# Altium PCB XPIAC-C_1V3.PCBDOC (part 2 of 4)
Units mil, origin at the board's own origin, x right, y up, seen from the top; angles counter-clockwise.
Board outline 2484.32 x 1736.28 mil, 6 copper layers (Top Layer, Internal Plane 1, Mid-Layer 1, Mid-Layer 2, Mid-Layer 3, Bottom Layer); 176 components, 110 nets, 677 pads, 395 vias.
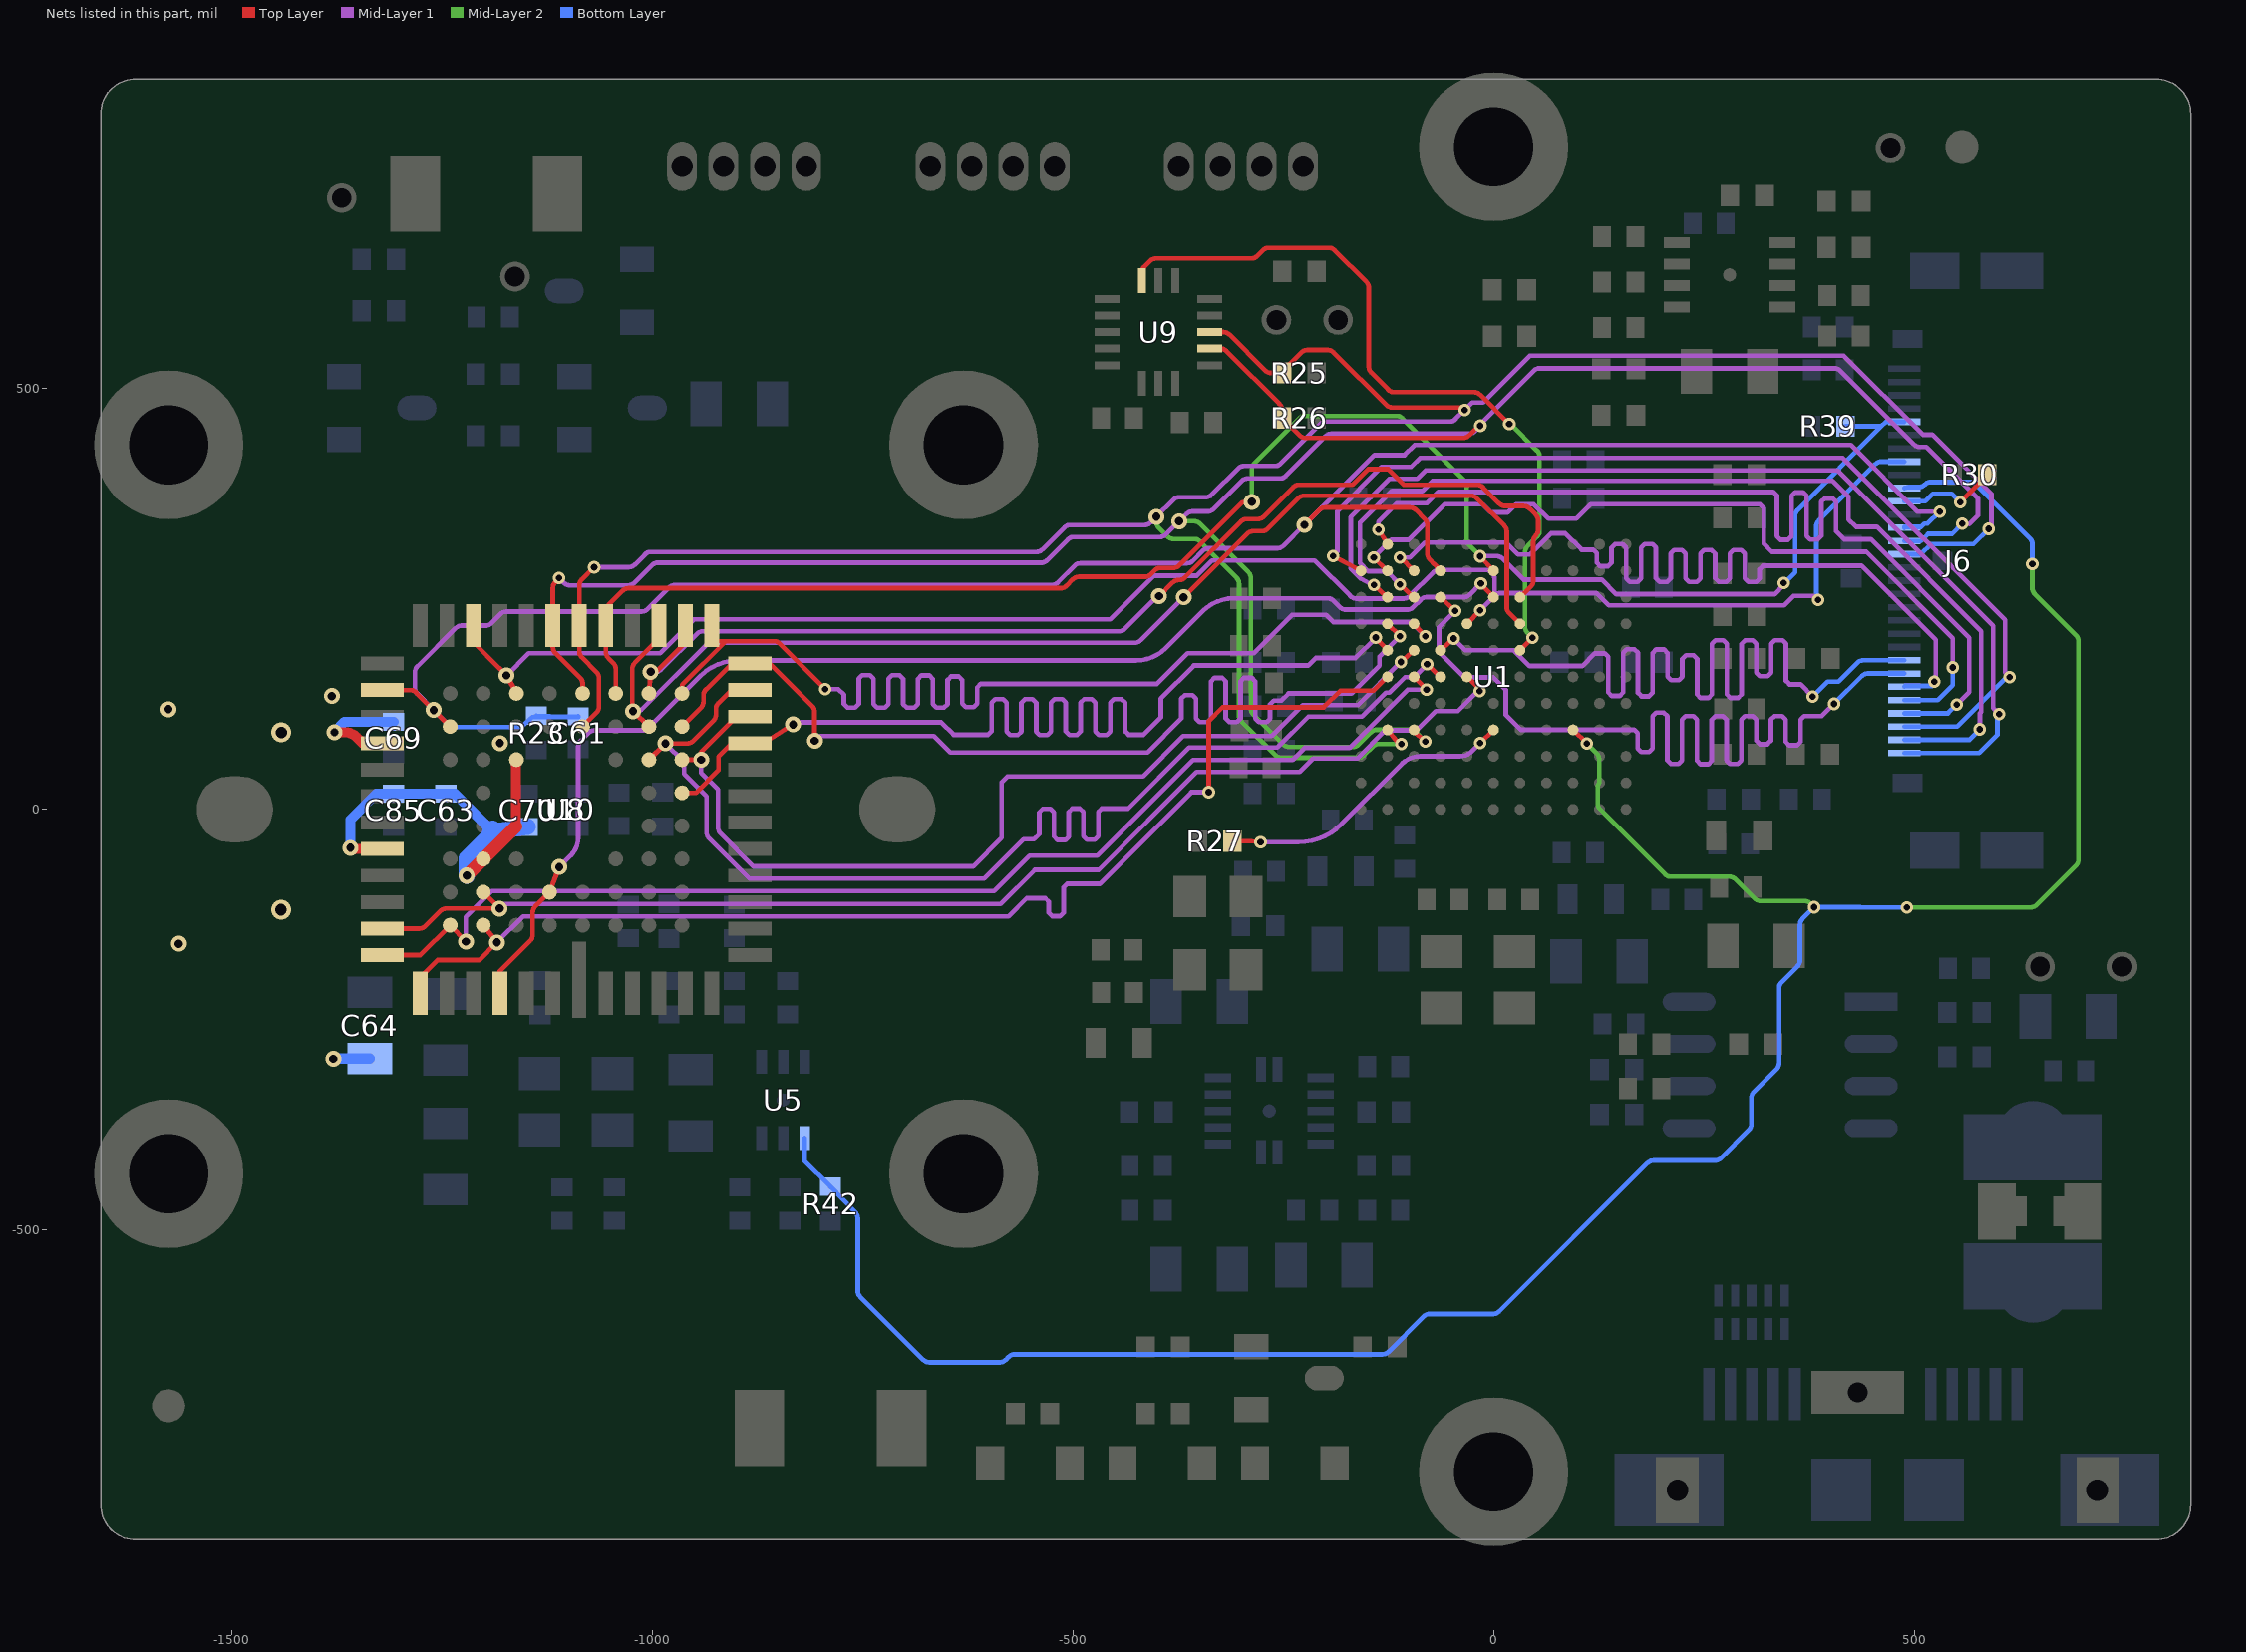
[diagram p6: the nets of this part, all layers, seen from the top]

## Via types
v1: diameter 15, hole 7.87, Top Layer to Bottom Layer, 163 vias
v2: diameter 19, hole 9.84, Top Layer to Bottom Layer, 131 vias
v3: diameter 23.62, hole 13.78, Top Layer to Bottom Layer, 77 vias
v4: diameter 27.95, hole 15.75, Top Layer to Bottom Layer, 17 vias
v5: diameter 0, hole 0, Top Layer to Bottom Layer, 3 vias
v6: diameter 20.47, hole 11.81, Top Layer to Bottom Layer, 2 vias
v7: diameter 35, hole 19.68, Top Layer to Bottom Layer, 2 vias

## Nets (pads, with @x,y where several pads share a name; then routed paths per layer and width w, separated by ;. In a path a pad name is that pad's centre, name@x,y a point inside that pad or via, vN(x,y) a via of type N, cw(c..) or ccw(c..) an arc to the next point about the centre after c; other vN are vias at no path point) (continued)
ADDR_CTL_0: J6.11 R30.1 | length 122.3
  Top Layer w5.6: v1(554.6,364.91) 587.68,398 R30.1@586.49,398
  Bottom Layer w5.6: J6.11@488.19,366.14 513.2,366.14 522.13,375.08 544.43,375.08 v1(554.6,364.91)
AGND: C63.1 C64.1 C69.1 C70.1 C85.1 U8.C7 U8.F6 U10.34 U10.38 | length 732.6
  Top Layer w12: v2(-1377.72,91.7) -1365.93,91.7 cw(c-1365.93,70.7) -1351.08,85.55 -1344.27,78.74 U10.34@-1320.87,78.74 ; v2(-1358.86,-45.69) -1357.31,-47.24 U10.38@-1320.87,-47.24 ; -1162.23,-20.5 -1162.23,58.24 U8.F6@-1161.42,59.06
  Top Layer w15.75: v2(-1220.47,-78.74) U8.C7@-1200.79,-59.06 -1162.23,-20.5
  Bottom Layer w12: v2(-1379.12,-296.47) -1378.88,-296.22 C64.1@-1335.86,-296.22 ; v2(-1377.72,91.7) -1377.72,92.03 -1365.57,104.18 C69.1@-1307.51,104.18 ; v2(-1358.86,-45.69) -1358.86,-12.26 -1327.99,18.62 C85.1@-1307.51,18.62 C63.1@-1245.14,18.62 -1234.58,18.62 -1193.02,-22.94 -1189.64,-22.94 -1192.75,-27.35
  Bottom Layer w19.68: v2(-1220.47,-78.74) -1220.47,-58.25 -1189.64,-27.43 -1189.64,-22.94 ; -1192.75,-27.35 C70.1@-1148.35,-20.75
  other v2: -1562.78,-159.86 -1181.1,78.74 -1575.12,118.99 -1380.88,134.68
  other v3: -1441.24,-119.27 -1440.88,91.38
CAMPWR_EN: J6.10 R42.1 U1.D3 U5.4 | length 3087.4
  Top Layer w5.6: U1.D3@94.49,94.49 111.27,78.95 v1(110.75,78.39)
  Mid-Layer 2 w5.6: v1(110.75,78.39) 122.76,66.37 ; v1(381.14,-116.29) v1@376.7,-111.85 ; v1(491.07,-116.62) 638.44,-116.62 ccw(c638.44,-106.82) 645.37,-113.75 692.17,-66.94 ccw(c685.24,-60.01) 695.04,-60.01 695.04,200.16 ccw(c685.24,200.16) 692.17,207.09 643.14,256.12 cw(c650.07,263.05) 640.27,263.05 v1(640.27,291.48) ; 122.76,66.37 cw(c115.83,59.44) 125.63,59.44 ; 122.76,66.37 cw(c115.83,59.44) 125.63,59.44 ; 123.89,6.73 ccw(c133.69,6.73) 126.76,-0.2 ; 123.89,6.73 ccw(c133.69,6.73) 126.76,-0.2 ; 123.89,6.73 123.89,29.12 125.63,30.86 125.63,59.44 ; 126.76,-0.2 203.75,-77.19 ; 203.75,-77.19 ccw(c210.68,-70.26) 210.68,-80.06 ; 203.75,-77.19 ccw(c210.68,-70.26) 210.68,-80.06 ; 210.68,-80.06 280.43,-80.06 ; 280.43,-80.06 cw(c280.43,-89.86) 287.36,-82.93 ; 280.43,-80.06 cw(c280.43,-89.86) 287.36,-82.93 ; 287.36,-82.93 310.53,-106.11 ; 310.53,-106.11 ccw(c317.46,-99.18) 317.46,-108.98 ; 310.53,-106.11 ccw(c317.46,-99.18) 317.46,-108.98 ; 317.46,-108.98 369.77,-108.98 ; 369.77,-108.98 cw(c369.77,-118.78) v1@376.7,-111.85 ; 369.77,-108.98 cw(c369.77,-118.78) v1@376.7,-111.85
  Bottom Layer w5.6: U5.4@-818.79,-390.81 -819.05,-391.06 -819.05,-417.7 R42.1@-788.1,-448.65 -758.5,-479.29 cw(c-765.55,-486.1) -755.75,-486.1 -755.75,-572.19 ccw(c-745.95,-572.19) -752.87,-579.12 -677.65,-654.35 ccw(c-670.72,-647.42) -670.72,-657.22 -586.82,-657.22 ccw(c-586.82,-647.42) -579.89,-654.35 -576.21,-650.66 cw(c-569.28,-657.59) -569.28,-647.79 -132.11,-647.79 ccw(c-132.11,-637.99) -125.18,-644.92 -82.86,-602.61 cw(c-75.93,-609.54) -75.93,-599.74 -0.27,-599.74 ccw(c-0.27,-589.94) 6.66,-596.87 183.25,-420.27 cw(c190.18,-427.2) 190.18,-417.4 263.26,-417.4 ccw(c263.26,-407.6) 270.19,-414.53 303.55,-381.17 ccw(c296.62,-374.24) 306.42,-374.24 306.42,-342.78 cw(c316.22,-342.78) 309.29,-335.86 336.65,-308.49 ccw(c329.72,-301.56) 339.52,-301.56 339.52,-212.47 cw(c349.32,-212.47) 342.4,-205.54 361.34,-186.6 ccw(c354.41,-179.67) 364.21,-179.67 364.21,-137.27 cw(c374.01,-137.27) 367.08,-130.34 v1(381.14,-116.29) 435.94,-116.29 436.27,-116.62 v1(491.07,-116.62) ; J6.10@488.19,381.89 491.61,382.85 cw(c494.27,373.42) 494.27,383.22 505.75,383.22 ccw(c505.75,393.02) 512.68,386.09 512.86,386.28 cw(c519.79,379.35) 519.79,389.15 566.19,389.15 cw(c566.19,379.35) 573.12,386.28 637.4,322 cw(c630.47,315.07) 640.27,315.07 v1(640.27,291.48)
CLK32K768: R27.1 U1.D6 | length 360.4
  Top Layer w5.6: R27.1@-310.35,-37.86 -288.23,-37.86 cw(c-288.23,-47.66) -287.2,-37.91 v1(-276.93,-38.99) ; v1(-15.75,78.74) U1.D6@0,94.49
  Mid-Layer 1 w5.6: v1(-276.93,-38.99) -231.96,-38.99 ccw(c-231.96,33.16) -180.94,-17.86 -108.92,54.16 cw(c-87.2,32.44) -87.2,63.16 -39.94,63.16 ccw(c-39.94,83.95) -25.24,69.25 v1(-15.75,78.74)
CMOS_D0: U1.F10 U8.A7 U10.43 | length 1435.6
  Top Layer w5.6: U10.43@-1275.59,-218.5 -1275.59,-199.48 -1255.38,-179.28 -1205.58,-179.28 v2(-1184.6,-158.3) ; v1(-338.56,20.48) -338.56,104.6 -321.92,121.24 -201.77,121.24 -181.97,141.04 -142.42,141.04 U1.F10@-125.98,157.48
  Top Layer w6: U8.A7@-1200.79,-137.8 v2(-1184.6,-158.3)
  Mid-Layer 1 w5.6: v2(-1184.6,-158.3) -1153.47,-127.17 -576.37,-127.17 -554.9,-105.7 -532.85,-105.7 -528.65,-109.9 -528.65,-122.96 -524.45,-127.16 -515.25,-127.16 -511.05,-122.96 -511.05,-92.73 -506.85,-88.53 -468.19,-88.53 -359.18,20.48 v1(-338.56,20.48) v1@-338.03,20.48
CMOS_D1: U1.F9 U8.A8 U10.42 | length 1426.6
  Top Layer w5.6: U10.42@-1320.87,-173.23 -1275.59,-173.23 U8.A8@-1240.16,-137.8 v2(-1221.56,-157.14) ; U1.F9@-94.49,157.48 v1(-79.58,142.38)
  Mid-Layer 1 w5.6: v2(-1221.56,-157.14) -1221.56,-127.99 -1190.82,-97.24 -593.57,-97.24 -551.4,-55.07 -470.79,-55.07 -356.95,58.77 -238.87,58.77 -224.42,73.22 -171.2,73.22 -102.04,142.38 v1(-79.58,142.38)
CMOS_D2: U1.F7 U8.B7 U10.41 | length 1471.3
  Top Layer w5.6: U10.41@-1320.87,-141.73 -1276.69,-141.73 ccw(c-1276.69,-131.93) -1269.76,-138.86 -1251.76,-120.86 cw(c-1244.83,-127.79) -1244.83,-117.99 v2(-1181.39,-117.99) U8.B7@-1200.79,-98.43 ; U1.F7@-31.5,157.48 -16.49,142.61 v1(-16.45,140.4)
  Mid-Layer 1 w5.6: v2(-1181.39,-117.99) -1175.88,-112.48 -585.78,-112.48 -545.23,-71.93 -469.38,-71.93 -352.82,44.63 -230.39,44.63 -214.53,60.49 -161.85,60.49 -128.34,94 -91.28,94 -68.44,116.84 -42.26,116.84 -18.69,140.4 v1(-16.45,140.4)
CMOS_D3: U1.G10 U8.E1 U10.15 | length 1332.7
  Top Layer w5.6: U8.E1@-964.57,19.69 -948.14,19.69 -921.14,46.69 -921.14,62.9 -905.3,78.74 U10.15@-883.86,78.74 -867.95,78.74 v2(-832.56,100.88) ; v1(-139.99,204.12) U1.G10@-125.98,188.98
  Mid-Layer 1 w5.6: v2(-832.56,100.88) -830.07,103.37 -656.5,103.37 -641.82,88.69 -600.63,88.69 -596.43,92.89 -596.43,126.91 -592.23,131.11 -583.03,131.11 -578.83,126.91 -578.83,92.41 -574.63,88.21 -565.43,88.21 -561.23,92.41 -561.23,126.91 -557.03,131.11 -547.83,131.11 -543.63,126.91 -543.63,92.41 -539.43,88.21 -530.23,88.21 -526.03,92.41 -526.03,126.91 -521.83,131.11 -512.63,131.11 -508.43,126.91 -508.43,92.41 -504.23,88.21 -495.03,88.21 -490.83,92.41 -490.83,126.91 -486.63,131.11 -477.43,131.11 -473.23,126.91 -473.23,92.41 -469.03,88.21 -459.83,88.21 -455.63,92.41 -455.63,126.91 -451.43,131.11 -442.23,131.11 -438.03,126.91 -438.03,92.89 -433.83,88.69 -415.73,88.69 -395.48,108.94 -395.48,131.73 -356.25,170.96 -220.15,170.96 -211.33,179.78 -164.33,179.78 v1(-139.99,204.12)
CMOS_D4: U1.G9 U8.F1 U10.16 | length 1189.4
  Top Layer w5.6: U8.F1@-964.57,59.06 v2(-941.87,58.98) -941.87,68.3 -899.77,110.39 -884.01,110.39 U10.16@-883.86,110.24 ; v1(-109.99,175.18) U1.G9@-94.49,188.98
  Mid-Layer 1 w5.6: v2(-941.87,58.98) -941.87,43.49 -921.85,23.48 -921.85,-21.45 ccw(c-912.05,-21.45) -918.98,-28.38 -879.57,-67.8 -618.71,-67.8 -584.72,-33.81 -584.72,32.34 -577.85,39.21 -416.7,39.21 -368.87,87.05 -263.5,87.05 -226.58,123.96 -161.21,123.96 v1(-109.99,175.18)
CMOS_D5: U1.F8 U8.F2 U10.17 | length 1441.3
  Top Layer w5.6: v2(-984.38,78.4) -958.38,78.4 ccw(c-958.38,88.2) -951.45,81.27 -927.17,105.56 ccw(c-934.1,112.49) -924.3,112.49 -924.29,119.26 cw(c-914.49,119.26) -921.42,126.19 -905.89,141.73 U10.17@-883.86,141.73 ; v1(-78.92,172.44) -63.48,157 U1.F8@-62.99,157.48
  Top Layer w6: U8.F2@-1003.94,59.06 v2(-984.38,78.4)
  Mid-Layer 1 w5.5: v2(-984.38,78.4) -962.15,56.17 -962.15,42.26 -935.44,15.55 -935.44,-27.41 ccw(c-925.81,-27.41) -932.62,-34.22 -884.47,-82.36 -605.48,-82.36 -558.82,-35.69 -546.09,-35.69 -539.94,-29.54 -539.94,-3.46 -535.82,0.67 -526.57,0.67 -522.44,-3.46 -522.44,-32.26 -518.25,-36.45 -509,-36.45 -504.94,-32.38 -504.94,-3.16 -500.82,0.97 -491.57,0.97 -487.44,-3.16 -487.44,-31.78 -483.28,-35.94 -474.03,-35.94 -469.94,-31.86 -469.94,-3.16 -465.82,0.97 -434.33,0.97 -361.93,73.37 -256.85,73.37 -219.97,110.24 -156.18,110.24 -127.74,138.69 -123.6,138.69 -105.09,157.19 -94.17,157.19 v1(-78.92,172.44)
CMOS_D6: U1.H10 U8.G1 U10.18 | length 1304.3
  Top Layer w5.6: U8.G1@-964.57,98.43 -941.96,121.03 ccw(c-948.89,127.96) -939.09,127.96 -939.09,135.56 cw(c-929.29,135.56) -936.22,142.49 -905.48,173.23 U10.18@-883.86,173.23 -860.36,173.23 -810.04,122.91 cw(c-816.97,115.98) -807.17,115.98 -807.17,81.62 v2(-806.77,81.62) ; U1.H10@-125.98,220.47 -111.47,205.96 -111.47,206.66 v1(-111.35,205.82)
  Mid-Layer 1 w5.6: v2(-806.77,81.62) -806.16,81.02 -799.93,87.25 -665.44,87.25 -645.85,67.65 -411.24,67.65 -371.11,107.79 -371.11,131.43 -366.91,135.63 -357.71,135.63 -353.51,131.43 -353.51,107.79 -349.31,103.59 -340.11,103.59 -335.91,107.79 -335.91,151.99 -331.71,156.19 -322.51,156.19 -318.31,151.99 -318.31,107.79 -314.11,103.59 -304.91,103.59 -300.71,107.79 -300.71,151.99 -296.51,156.19 -287.31,156.19 -283.11,151.99 -283.11,107.79 -278.91,103.59 -269.71,103.59 -265.51,107.79 -265.51,125.14 -261.31,129.34 -252.11,129.34 -243.71,137.74 -168.6,137.74 -135.58,170.76 -135.58,181.59 v1(-111.35,205.82)
CMOS_D7: U1.H9 U8.H1 U10.19 | length 1341.2
  Top Layer w5.6: U8.H1@-964.57,137.8 -964.57,147.89 -912.63,199.83 ; U10.19@-929.13,218.5 -929.13,199.83 -912.63,199.83 ; v1(-794.35,142.8) -848.51,196.96 ccw(c-855.44,190.03) -855.44,199.83 -912.63,199.83 ; U1.H9@-94.49,220.47 v1(-81.26,205.44)
  Mid-Layer 1 w5.6: v1(-794.35,142.8) -778.84,142.8 -772.14,136.09 -772.14,125.11 -767.94,120.91 -758.74,120.91 -754.54,125.11 -754.54,155.28 -750.34,159.48 -741.14,159.48 -736.94,155.28 -736.94,125.11 -732.74,120.91 -723.54,120.91 -719.34,125.11 -719.34,155.28 -715.14,159.48 -705.94,159.48 -701.74,155.28 -701.74,125.11 -697.54,120.91 -688.34,120.91 -684.14,125.11 -684.14,154.98 -679.94,159.18 -670.74,159.18 -666.54,154.98 -666.54,125.11 -662.34,120.91 -653.14,120.91 -648.94,125.11 -648.94,153.75 -644.74,157.95 -635.54,157.95 -631.34,153.75 -631.34,125.61 -627.14,121.41 -617.94,121.41 -613.74,125.61 -613.74,144.92 -609.54,149.12 -399.94,149.12 -363.49,185.57 -284.95,185.57 -239.47,231.06 -198.93,231.06 -190.53,222.66 -98.48,222.66 v1(-81.26,205.44)
CMOS_D8: J6.30 U1.J10 | length 1234.3
  Top Layer w5.6: v1(-142.02,266.73) U1.J10@-125.98,251.97
  Mid-Layer 1 w5.6: v1(-142.02,266.73) -142.6,265.68 -157.42,273.92 -169.74,286.25 -169.74,347.04 -123.98,392.81 -90.82,392.81 -80.74,402.89 408.98,402.89 593.63,218.24 593.63,120.45 v1(601.02,113.06)
  Bottom Layer w5.6: J6.30@488.19,66.93 577.05,66.93 598.7,88.58 598.7,110.73 v1(601.02,113.06)
CMOS_D9: J6.29 U1.J9 | length 1189.9
  Top Layer w5.6: v1(-111.23,267.4) U1.J9@-94.49,251.97
  Mid-Layer 1 w5.6: v1(-111.23,267.4) -126.8,282.97 -149.13,282.97 -158.64,292.48 -158.64,340.93 -120.9,378.67 -120.53,378.3 -84.61,378.3 -72.44,390.47 402.8,390.47 421.87,371.4 421.87,344.56 430.7,335.74 455.46,335.74 579.5,211.69 579.5,115.75 577.93,114.18 v1(577.93,95.12)
  Bottom Layer w5.6: J6.29@488.19,82.68 565.49,82.68 v1(577.93,95.12)
CMOS_D10: J6.28 U1.K11 | length 1212.6
  Top Layer w5.6: v1(-190.64,301.02) U1.K11@-157.48,283.46
  Mid-Layer 1 w5.6: v1(-190.64,301.02) -190.84,301.22 -185.63,306.44 -185.63,354.55 -133.1,407.08 -97.96,407.08 -87.2,417.85 415.05,417.85 607.97,224.92 607.97,162.38 v1(613.35,157)
  Bottom Layer w5.6: J6.28@488.19,98.43 551.2,98.43 609.77,157 v1(613.35,157)
CMOS_D11: J6.27 U1.L10 | length 1186.1
  Top Layer w5.6: v1(-136.67,332.39) U1.L10@-125.98,314.96
  Mid-Layer 1 w5.6: v1(-136.67,332.39) -136.67,341.97 -114.84,363.8 -79.08,363.8 -65.64,377.24 332.62,377.24 336.82,373.04 336.82,324.61 341.02,320.41 350.22,320.41 354.42,324.61 354.42,372.46 358.62,376.66 367.82,376.66 372.02,372.46 372.02,324.92 376.22,320.72 385.42,320.72 389.62,324.92 389.62,365.39 393.82,369.59 403.02,369.59 407.22,365.39 407.22,330.43 416.75,320.9 448.47,320.9 565.38,204 565.38,139.51 v1(550.36,124.49)
  Bottom Layer w5.6: J6.27@488.19,114.17 540.04,114.17 v1(550.36,124.49)
CMOS_D12: J6.26 U1.K10 | length 971.7
  Top Layer w5.6: v1(-142.4,299.21) U1.K10@-125.98,283.46
  Mid-Layer 1 w5.6: v1(-142.4,299.21) -121.23,320.38 -100.57,320.38 -58.15,362.8 -13.05,362.8 -3.03,352.77 16.83,352.77 26.86,362.8 47.74,362.8 65.13,345.42 98.52,345.42 115.91,362.8 315.92,362.8 316.42,362.3 317.09,362.3 321.29,358.1 321.29,315.6 330.81,306.07 443.14,306.07 545.88,203.33 v1(545.88,168.65)
  Bottom Layer w5.6: J6.26@488.19,129.92 527.99,129.92 545.88,147.8 v1(545.88,168.65)
CMOS_D13: J6.25 U1.K9 | length 1190.4
  Top Layer w5.6: v1(-111.21,299.21) -110.6,299.8 U1.K9@-94.49,283.46
  Mid-Layer 1 w5.6: v1(-111.21,299.21) -99.33,299.21 -81.46,317.08 15.11,317.08 29.25,302.94 43.36,302.94 68.37,327.95 85.33,327.95 104.75,308.53 118.46,308.53 122.66,304.33 122.66,293.06 126.86,288.86 136.06,288.86 140.26,293.06 140.26,311.03 144.46,315.23 153.66,315.23 157.86,311.03 157.86,274.3 162.06,270.1 171.26,270.1 175.46,274.3 175.46,311.11 179.66,315.31 188.86,315.31 193.06,311.11 193.06,274.3 197.26,270.1 206.46,270.1 210.66,274.3 210.66,303.88 214.86,308.08 224.06,308.08 228.26,303.88 228.26,274.3 232.46,270.1 241.66,270.1 245.86,274.3 245.86,303.88 250.06,308.08 259.26,308.08 263.46,303.88 263.46,274.3 267.66,270.1 276.86,270.1 281.06,274.3 281.06,303.88 285.26,308.08 294.46,308.08 298.66,303.88 298.66,274.3 302.86,270.1 312.06,270.1 316.26,274.3 316.26,285.32 320.46,289.52 437.38,289.52 525.55,201.35 525.55,151.62 v1(523.81,151.62)
  Bottom Layer w5.6: J6.25@488.19,145.67 489.24,146.72 521.12,146.72 524.91,150.51 v1(523.81,151.62)
CMOS_D14: J6.24 U1.J8 | length 1207.4
  Top Layer w5.6: U1.J8@-62.99,251.97 v1(-45.55,235.82)
  Mid-Layer 1 w5.6: v1(-45.55,235.82) -64.7,216.66 -64.7,186.95 -34.39,156.64 -0.03,156.64 14.69,141.92 14.69,112.24 32.27,94.66 167.19,94.66 171.39,90.46 171.39,72.47 175.59,68.27 184.79,68.27 188.99,72.47 188.99,110.87 193.19,115.07 202.39,115.07 206.59,110.87 206.59,58.07 210.79,53.87 219.99,53.87 224.19,58.07 224.19,106.73 228.39,110.93 237.59,110.93 241.79,106.73 241.79,57.84 245.99,53.64 255.19,53.64 259.39,57.84 259.39,106.73 263.59,110.93 272.79,110.93 276.99,106.73 276.99,58.07 281.19,53.87 290.39,53.87 294.59,58.07 294.59,106.73 298.79,110.93 307.99,110.93 312.19,106.73 312.19,81.62 316.39,77.42 325.59,77.42 329.79,81.62 329.79,106.73 333.99,110.93 343.19,110.93 347.39,106.73 347.39,80.34 351.59,76.14 360.79,76.14 364.99,80.34 364.99,106.73 369.19,110.93 390.21,110.93 v1(404.71,125.43)
  Bottom Layer w5.6: v1(404.71,125.43) 437.83,158.55 cw(c444.75,151.62) 444.75,161.42 J6.24@488.19,161.42
CMOS_D15: J6.23 U1.G8 | length 1213.8
  Top Layer w5.6: U1.G8@-62.99,188.98 v1(-47.44,202.96)
  Mid-Layer 1 w5.6: v1(-47.44,202.96) -33.59,189.11 23.85,189.11 42.6,170.37 105.55,170.37 120.49,185.31 132.25,185.31 136.45,181.11 136.45,138.99 140.65,134.79 149.85,134.79 154.05,138.99 154.05,186.05 158.25,190.25 167.45,190.25 171.65,186.05 171.65,138.52 175.85,134.32 185.05,134.32 189.25,138.52 189.25,185.78 193.45,189.98 202.65,189.98 206.85,185.78 206.85,157.78 211.05,153.58 220.25,153.58 224.45,157.78 224.45,179.1 228.65,183.3 237.85,183.3 242.05,179.1 242.05,136.62 246.25,132.42 255.45,132.42 259.65,136.62 259.65,196.72 263.85,200.92 273.05,200.92 277.25,196.72 277.25,136.62 281.45,132.42 290.65,132.42 294.85,136.62 294.85,196.72 299.05,200.92 308.25,200.92 312.45,196.72 312.45,162.31 316.65,158.11 325.85,158.11 330.05,162.31 330.05,196.72 334.25,200.92 343.45,200.92 347.65,196.72 347.65,152.74 351.85,148.54 364.87,148.54 v1(379.35,134.06)
  Bottom Layer w5.6: v1(379.35,134.06) 397.02,151.72 409.82,151.72 432.39,174.3 cw(c439.32,167.37) 439.32,177.17 J6.23@488.19,177.17
CMOS_HD: U1.J5 U8.H2 U10.20 | length 1378.4
  Top Layer w5.6: U8.H2@-1003.94,137.8 v2(-1001.9,163.46) -995.19,163.46 -960.63,198.01 U10.20@-960.63,218.5 ; v2(-397.55,253.3) -381.23,269.62 cw(c-374.3,262.69) -374.3,272.49 -373.87,272.49 ccw(c-373.87,282.29) -366.94,275.36 -300.17,342.14 cw(c-293.24,335.21) -293.24,345.01 -280.01,345.01 ccw(c-280.01,354.81) -273.08,347.88 -237.96,382.99 cw(c-231.03,376.06) -231.03,385.86 -167.42,385.86 -148.98,404.3 -124.8,404.3 -106.95,386.46 -106.95,385.86 -19.64,385.86 cw(c-19.64,376.06) -12.71,382.99 6.84,363.44 ccw(c13.77,370.37) 13.77,360.57 35.65,360.57 cw(c35.65,350.77) 42.58,357.7 50.17,350.11 cw(c43.24,343.18) 53.04,343.18 53.04,332.22 cw(c43.24,332.22) 50.17,325.3 50.11,325.24 ccw(c57.04,318.31) 47.24,318.31 47.24,271.78 cw(c37.44,271.78) 44.37,264.85 U1.J5@31.5,251.97
  Mid-Layer 1 w5.6: v2(-1001.9,163.46) -996.21,163.46 ccw(c-996.21,173.26) -989.28,166.33 -946.94,208.66 cw(c-940.01,201.73) -940.01,211.53 -445.38,211.53 ccw(c-445.38,221.33) -438.45,214.4 -399.55,253.3 v2(-397.55,253.3)
CMOS_OE: J6.8 U1.H7 U8.H6 U10.28 | length 2100.6
  Top Layer w5.6: U10.28@-1212.6,218.5 -1212.6,198.83 -1181.1,167.34 v2(-1173.24,159.07) ; U1.H7@-31.5,220.47 v1(-16.06,236.63)
  Top Layer w6: v2(-1173.24,159.07) U8.H6@-1161.42,137.8
  Mid-Layer 1 w5.6: v2(-1173.24,159.07) -1146.75,185.55 -990.82,185.55 -950.51,225.86 -455.38,225.86 -403.51,277.73 -352.67,277.73 -334.66,295.74 -212.55,295.74 -170.18,253.36 ; v1(-16.06,236.63) 1.15,253.84 ; v1(385.79,249.02) 386.12,249.02 381.64,253.5 356.49,253.5 345.31,242.33 136.87,242.33 122.18,257.02 8.39,257.02 ccw(c8.39,247.22) 1.46,254.15 1.15,253.84 ; -170.18,253.36 ccw(c-163.25,260.29) -163.25,250.49 ; -170.18,253.36 ccw(c-163.25,260.29) -163.25,250.49 ; -163.25,250.49 -106.81,250.49 ; -106.81,250.49 ccw(c-106.81,260.29) -99.88,253.36 ; -106.81,250.49 ccw(c-106.81,260.29) -99.88,253.36 ; -99.88,253.36 -71.58,281.66 ; -71.58,281.66 cw(c-64.65,274.73) -64.65,284.53 ; -71.58,281.66 cw(c-64.65,274.73) -64.65,284.53 ; -64.65,284.53 -30.46,284.53 -30.4,284.59 -9.39,284.59 ; -9.39,284.59 cw(c-9.39,274.79) -2.46,281.72 ; -9.39,284.59 cw(c-9.39,274.79) -2.46,281.72 ; -2.46,281.72 -1.72,280.98 ; -1.72,280.98 cw(c-8.65,274.05) 1.15,274.05 ; -1.72,280.98 cw(c-8.65,274.05) 1.15,274.05 ; 1.15,253.84 1.15,274.05
  Bottom Layer w5.6: v1(385.79,249.02) 383.64,248.35 383.64,335.93 cw(c393.44,335.93) 386.51,342.86 454.16,410.52 cw(c461.09,403.59) 461.09,413.39 J6.8@488.19,413.39
CMOS_PCLK: U1.J6 U8.B5 U10.46 | length 1505.4
  Top Layer w5.6: U10.46@-1181.1,-218.5 -1181.1,-192.27 -1145.03,-156.2 ccw(c-1151.96,-149.27) -1142.16,-149.27 -1142.16,-122.6 cw(c-1132.36,-122.6) -1139.29,-115.67 U8.B5@-1122.05,-98.43 ; v1(-15.08,268.35) U1.J6@0,251.97
  Top Layer w6: U8.B5@-1122.05,-98.43 v2(-1110.4,-68.56)
  Mid-Layer 1 w5.6: v2(-1110.4,-68.56) -1096.96,-55.12 ccw(c-1118.81,-33.27) -1087.91,-33.27 -1087.91,74.6 cw(c-1078.11,74.6) -1085.04,81.53 -1075.58,90.99 cw(c-1068.65,84.06) -1068.65,93.86 -1011.5,93.86 ccw(c-1011.5,103.66) -1004.57,96.73 -943.11,158.19 cw(c-897.9,112.97) -897.9,176.92 -424.82,176.92 ccw(c-424.82,226.7) -389.62,191.5 -345.64,235.48 cw(c-308.65,198.49) -308.65,250.8 -197.2,250.8 cw(c-197.2,241) -190.27,247.93 -182.43,240.09 ccw(c-175.5,247.02) -175.5,237.22 -102.66,237.22 ccw(c-102.66,247.02) -95.73,240.09 -86.64,249.19 cw(c-79.71,242.26) -79.71,252.06 -35.44,252.06 ccw(c-35.44,261.86) -28.51,254.93 v1(-15.08,268.35)
CMOS_RST: C61.2 J6.13 R23.1 U1.K8 U8.G8 U10.32 | length 2816.4
  Top Layer w5.6: U10.32@-1320.87,141.73 -1287.52,141.73 cw(c-1287.52,131.93) -1280.59,138.86 v2(-1259.84,118.11) ; v2(-224.85,338.03) -206.97,355.91 cw(c-200.04,348.98) -200.04,358.78 -99.38,358.78 cw(c-99.38,348.98) -92.45,355.91 -81.59,345.06 cw(c-88.52,338.13) -78.72,338.13 -78.72,303.9 ccw(c-68.92,303.9) -75.85,296.97 -70.13,291.25 cw(c-77.06,284.32) -69.84,290.94 U1.K8@-62.99,283.46
  Top Layer w6: v2(-1259.84,118.11) U8.G8@-1240.16,98.43
  Mid-Layer 1 w5.5: v2(-1259.84,118.11) -1279.29,137.56 ; v2(-224.85,338.03) -249.78,313.1 ; -1282.11,144.36 ccw(c-1272.48,144.36) -1279.29,137.56 ; -1282.11,144.36 ccw(c-1272.48,144.36) -1279.29,137.56 ; -1282.11,144.36 -1282.11,162.99 ; -1282.11,162.99 cw(c-1272.48,162.99) -1279.29,169.8 ; -1282.11,162.99 cw(c-1272.48,162.99) -1279.29,169.8 ; -1279.29,169.8 -1233.58,215.51 ; -1233.58,215.51 cw(c-1226.78,208.7) -1226.78,218.32 ; -1233.58,215.51 cw(c-1226.78,208.7) -1226.78,218.32 ; -1226.78,218.33 -1198.07,218.33 ; -1198.07,218.33 ccw(c-1198.07,227.95) -1191.27,221.14 ; -1198.07,218.33 ccw(c-1198.07,227.95) -1191.27,221.14 ; -1191.27,221.14 -1180.26,232.15 ; -1180.26,232.15 cw(c-1173.45,225.35) -1173.45,234.97 ; -1180.26,232.15 cw(c-1173.45,225.35) -1173.45,234.97 ; -1173.45,234.97 -1012.71,234.97 ; -1012.71,234.97 ccw(c-1012.71,244.6) -1005.91,237.79 ; -1012.71,234.97 ccw(c-1012.71,244.6) -1005.91,237.79 ; -1005.91,237.79 -979.91,263.78 ; -979.91,263.78 cw(c-973.11,256.98) -973.11,266.6 ; -979.91,263.78 cw(c-973.11,256.98) -973.11,266.6 ; -973.11,266.6 -524.84,266.6 ; -524.84,266.6 ccw(c-524.84,276.23) -518.03,269.42 ; -524.84,266.6 ccw(c-524.84,276.23) -518.03,269.42 ; -518.03,269.42 -497.83,289.63 ; -497.83,289.63 cw(c-491.02,282.82) -491.02,292.45 ; -497.83,289.63 cw(c-491.02,282.82) -491.02,292.45 ; -491.02,292.45 -364.23,292.45 ; -364.23,292.45 ccw(c-364.23,302.07) -357.43,295.26 ; -364.23,292.45 ccw(c-364.23,302.07) -357.43,295.26 ; -357.43,295.26 -345.23,307.46 ; -345.23,307.46 cw(c-338.43,300.66) -338.43,310.28 ; -345.23,307.46 cw(c-338.43,300.66) -338.43,310.28 ; -338.43,310.28 -256.59,310.28 ; -256.59,310.28 ccw(c-256.59,319.91) -249.78,313.1 ; -256.59,310.28 ccw(c-256.59,319.91) -249.78,313.1
  Mid-Layer 1 w5.6: v2(-224.85,338.03) -141.4,421.05 -105.76,421.05 -93.73,433.08 424.73,433.08 503.87,353.86 v1(530.21,353.86)
  Bottom Layer w5.5: v2(-1259.84,118.11) -1242.46,100.73 ccw(c-1235.66,107.54) -1235.66,97.91 -1158.84,97.91 ccw(c-1158.84,107.54) -1152.03,100.73 -1145.28,107.48 cw(c-1138.47,100.68) -1138.54,110.3 C61.2@-1088.01,110.65
  Bottom Layer w5.6: R23.1@-1137.64,111.44 -1087.56,109.53 -1142.49,109.53 C61.2@-1088.01,110.65 ; J6.13@488.19,334.65 488.19,335.6 508.13,335.6 511.95,339.43 515.78,339.43 v1(530.21,353.86)
CMOS_VD: U1.H5 U8.G2 U10.21 | length 1418.1
  Top Layer w5.6: v2(-1022.74,116.73) -1023.68,117.66 -1023.68,167.08 cw(c-1013.88,167.08) -1020.81,174.01 -992.13,202.69 U10.21@-992.13,218.5 ; v2(-368.34,251.94) -292.56,327.72 cw(c-285.63,320.79) -285.63,330.59 -275.35,330.59 ccw(c-275.35,340.39) -268.42,333.46 -232,369.88 cw(c-225.07,362.95) -225.07,372.75 -26.71,372.75 cw(c-26.71,362.95) -19.78,369.88 12.86,337.23 cw(c5.93,330.3) 15.73,330.3 15.73,240.29 ccw(c25.53,240.29) 18.6,233.36 U1.H5@31.5,220.47
  Top Layer w6: v2(-1022.74,116.73) U8.G2@-1003.94,98.43
  Mid-Layer 1 w5.5: v2(-1022.74,116.73) -1018.35,116.73 ccw(c-1018.35,126.35) -1011.55,119.55 -935.99,195.1 cw(c-929.18,188.3) -929.18,197.92 -426.35,197.92 ccw(c-426.35,207.55) -419.54,200.74 v2(-368.34,251.94)
EXPOSURE: J6.5 R39.1 U1.K6 U8.H3 U10.23 | length 2287.8
  Top Layer w5.6: U8.H3@-1043.31,137.8 -1043.31,166.83 ccw(c-1053.11,166.83) -1046.18,173.76 -1052.25,179.83 cw(c-1045.32,186.76) -1055.12,186.76 U10.23@-1055.12,218.5 U10.23@-1055.12,235.77 ; v2(-287.24,365.46) -287.61,365.08 -298.26,365.08 -373.61,289.74 ; v1(-15.91,300.83) -15.95,300.79 U1.K6@0,283.46 ; U10.23@-1055.12,235.77 cw(c-1045.32,235.77) U10.23@-1052.25,242.7 ; U10.23@-1055.12,235.77 cw(c-1045.32,235.77) U10.23@-1052.25,242.7 ; U10.23@-1055.12,235.77 cw(c-1045.32,235.77) U10.23@-1052.25,242.7 ; U10.23@-1052.25,242.7 -1035.02,259.93 ; -1035.02,259.93 cw(c-1028.09,253) -1028.09,262.8 ; -1035.02,259.93 cw(c-1028.09,253) -1028.09,262.8 ; -1035.02,259.93 cw(c-1028.09,253) -1028.09,262.8 ; -1028.09,262.8 -514.46,262.8 ; -514.46,262.8 ccw(c-514.46,272.6) -507.53,265.67 ; -514.46,262.8 ccw(c-514.46,272.6) -507.53,265.67 ; -514.46,262.8 ccw(c-514.46,272.6) -507.53,265.67 ; -507.53,265.67 -499.68,273.52 ; -499.68,273.52 cw(c-492.75,266.59) -492.75,276.39 ; -499.68,273.52 cw(c-492.75,266.59) -492.75,276.39 ; -499.68,273.52 cw(c-492.75,266.59) -492.75,276.39 ; -492.75,276.39 -414.4,276.39 ; -414.4,276.39 ccw(c-414.4,286.19) -407.47,279.26 ; -414.4,276.39 ccw(c-414.4,286.19) -407.47,279.26 ; -414.4,276.39 ccw(c-414.4,286.19) -407.47,279.26 ; -407.47,279.26 -402.73,284 ; -402.73,284 cw(c-395.8,277.07) -395.8,286.87 ; -402.73,284 cw(c-395.8,277.07) -395.8,286.87 ; -402.73,284 cw(c-395.8,277.07) -395.8,286.87 ; -395.8,286.87 -380.54,286.87 ; -380.54,286.87 ccw(c-380.54,296.67) -373.61,289.74 ; -380.54,286.87 ccw(c-380.54,296.67) -373.61,289.74 ; -380.54,286.87 ccw(c-380.54,296.67) -373.61,289.74
  Mid-Layer 1 w5.6: v1(-15.91,300.83) v1(-15.91,300.83) 3.75,300.91 ; v1(344.93,268.95) 344.77,266.43 333.99,255.66 145.82,255.66 128.53,272.95 35.8,272.95 20.08,288.66 10.67,298.05 ; 3.75,300.91 cw(c3.75,291.11) 10.67,298.05 ; 3.75,300.91 cw(c3.75,291.11) 10.67,298.05
  Mid-Layer 2 w5.6: v2(-287.24,365.46) -287.24,404.25 ; v1(-15.91,300.83) -29.03,313.89 ; -287.24,404.25 cw(c-277.44,404.25) -284.37,411.18 ; -287.24,404.25 cw(c-277.44,404.25) -284.37,411.18 ; -287.24,404.25 cw(c-277.44,404.25) -284.37,411.18 ; -284.37,411.18 -230.76,464.79 ; -230.76,464.79 cw(c-223.83,457.86) -223.83,467.66 ; -230.76,464.79 cw(c-223.83,457.86) -223.83,467.66 ; -230.76,464.79 cw(c-223.83,457.86) -223.83,467.66 ; -223.83,467.66 -115.19,467.66 ; -115.19,467.66 cw(c-115.19,457.86) -108.26,464.79 ; -115.19,467.66 cw(c-115.19,457.86) -108.26,464.79 ; -115.19,467.66 cw(c-115.19,457.86) -108.26,464.79 ; -108.26,464.79 -34.77,391.3 ; -34.77,391.3 cw(c-41.7,384.37) -31.9,384.37 ; -34.77,391.3 cw(c-41.7,384.37) -31.9,384.37 ; -34.77,391.3 cw(c-41.7,384.37) -31.9,384.37 ; -31.9,320.82 ccw(c-22.1,320.82) -29.03,313.89 ; -31.9,320.82 ccw(c-22.1,320.82) -29.03,313.89 ; -31.9,320.82 ccw(c-22.1,320.82) -29.03,313.89 ; -31.9,320.82 -31.9,384.37
  Bottom Layer w5.6: v1(344.93,268.95) 345.86,268.44 346.53,269.66 358.43,281.56 358.43,348.61 ; R39.1@418.41,455.41 461.18,455.41 ; J6.5@488.19,460.63 466.4,460.63 461.18,455.41 ; 358.43,348.61 cw(c368.23,348.61) 361.3,355.54 ; 358.43,348.61 cw(c368.23,348.61) 361.3,355.54 ; 361.3,355.54 461.18,455.41
FX3_SCL: J6.14 R26.2 U1.D9 U8.H4 U9.2 U10.25 | length 3193.8
  Top Layer w5.6: v1(-1110.64,274.77) v1@-1115.24,270.17 ; U8.H4@-1082.68,137.8 -1082.68,149.13 ccw(c-1092.48,149.13) -1085.55,156.06 -1115.24,185.75 cw(c-1108.31,192.68) -1118.11,192.68 U10.25@-1118.11,218.5 -1118.11,263.24 ; U9.2@-337.13,547.62 -324.47,547.62 cw(c-324.47,537.82) -317.54,544.75 -254.28,481.48 cw(c-261.21,474.55) -251.41,474.55 -251.41,465.15 R26.2@-251.3,465.15 -230.51,444.35 ccw(c-223.58,451.28) -223.58,441.48 -36.06,441.48 ccw(c-36.06,451.28) -29.13,444.35 -17.5,455.98 v1(-15.7,455.98) ; U1.D9@-94.49,94.49 -95.52,93.31 v1(-81.12,80.59) ; -1118.11,263.24 cw(c-1108.31,263.24) v1@-1115.24,270.17 ; -1118.11,263.24 cw(c-1108.31,263.24) v1@-1115.24,270.17 ; -1118.11,263.24 cw(c-1108.31,263.24) v1@-1115.24,270.17
  Mid-Layer 1 w5.6: v1(-1110.64,274.77) -1104.89,269.03 ; v1(557.19,339.68) 564.41,339.68 565.24,338.84 575.58,349.17 575.58,369.72 514.51,430.79 506.71,430.79 cw(c506.71,440.59) 499.78,433.66 412.12,521.31 ccw(c405.19,514.38) 405.19,524.18 54.76,524.18 ccw(c54.76,514.38) 47.83,521.31 -16.6,456.88 v1(-15.7,455.98) -22.36,449.31 ; -1104.89,269.03 ccw(c-1097.97,275.96) -1097.97,266.16 ; -1104.89,269.03 ccw(c-1097.97,275.96) -1097.97,266.16 ; -1104.89,269.03 ccw(c-1097.97,275.96) -1097.97,266.16 ; -1097.97,266.16 -1028.34,266.16 ; -1028.34,266.16 ccw(c-1028.34,275.96) -1021.41,269.03 ; -1028.34,266.16 ccw(c-1028.34,275.96) -1021.41,269.03 ; -1028.34,266.16 ccw(c-1028.34,275.96) -1021.41,269.03 ; -1021.41,269.03 -1000.27,290.18 ; -1000.27,290.18 cw(c-993.34,283.25) -993.34,293.05 ; -1000.27,290.18 cw(c-993.34,283.25) -993.34,293.05 ; -1000.27,290.18 cw(c-993.34,283.25) -993.34,293.05 ; -993.34,293.05 -537.68,293.05 ; -537.68,293.05 ccw(c-537.68,302.85) -530.75,295.92 ; -537.68,293.05 ccw(c-537.68,302.85) -530.75,295.92 ; -537.68,293.05 ccw(c-537.68,302.85) -530.75,295.92 ; -530.75,295.92 -505.88,320.79 ; -505.88,320.79 cw(c-498.95,313.86) -498.95,323.66 ; -505.88,320.79 cw(c-498.95,313.86) -498.95,323.66 ; -505.88,320.79 cw(c-498.95,313.86) -498.95,323.66 ; -498.95,323.66 -396.41,323.66 ; -396.41,323.66 ccw(c-396.41,333.46) -389.48,326.53 ; -396.41,323.66 ccw(c-396.41,333.46) -389.48,326.53 ; -396.41,323.66 ccw(c-396.41,333.46) -389.48,326.53 ; -389.48,326.53 v2(-373.62,342.38) -364.9,351.1 ; -364.9,351.1 cw(c-357.97,344.18) -357.97,353.98 ; -364.9,351.1 cw(c-357.97,344.18) -357.97,353.98 ; -357.97,353.98 -339.78,353.98 ; -339.78,353.98 ccw(c-339.78,363.78) -332.85,356.85 ; -339.78,353.98 ccw(c-339.78,363.78) -332.85,356.85 ; -332.85,356.85 -299.26,390.45 ; -299.26,390.45 cw(c-292.33,383.52) -292.33,393.32 ; -299.26,390.45 cw(c-292.33,383.52) -292.33,393.32 ; -292.33,393.32 -253.98,393.32 ; -253.98,393.32 ccw(c-253.98,403.12) -247.05,396.19 ; -253.98,393.32 ccw(c-253.98,403.12) -247.05,396.19 ; -247.05,396.19 -199.67,443.57 ; -199.67,443.57 cw(c-192.74,436.64) -192.74,446.44 ; -199.67,443.57 cw(c-192.74,436.64) -192.74,446.44 ; -192.74,446.44 -29.29,446.44 ; -29.29,446.44 ccw(c-29.29,456.24) -22.36,449.31 ; -29.29,446.44 ccw(c-29.29,456.24) -22.36,449.31
  Mid-Layer 2 w5.6: v2(-373.62,342.38) -355.84,342.38 cw(c-355.84,332.58) -348.91,339.51 -291.29,281.9 cw(c-298.22,274.97) -288.42,274.97 -288.42,119.5 ccw(c-278.62,119.5) -285.55,112.57 -250.02,77.03 ccw(c-243.09,83.96) -243.09,74.16 -167.12,74.16 ccw(c-167.12,83.96) -160.19,77.03 -145.51,91.71 cw(c-138.58,84.78) -138.58,94.58 -99.17,94.58 cw(c-99.17,84.78) -92.24,91.71 v1(-81.12,80.59)
  Bottom Layer w5.6: J6.14@488.19,318.9 507.97,318.9 516.47,327.4 544.92,327.4 v1(557.19,339.68)
FX3_SDA: J6.15 R25.2 U1.D10 U8.G4 U9.3 U10.24 | length 3237.7
  Top Layer w5.6: U8.G4@-1082.68,98.43 -1066.29,114.82 ccw(c-1073.22,121.74) -1063.42,121.74 -1063.42,156.22 ccw(c-1073.22,156.22) -1066.29,163.15 -1083.74,180.61 cw(c-1076.81,187.54) -1086.61,187.54 U10.24@-1086.61,218.5 -1086.61,266.14 ; v1(-1069.04,287.77) -1083.74,273.07 ; U9.3@-337.13,567.3 -321,567.3 cw(c-321,557.5) -314.07,564.43 -271.22,521.58 ccw(c-264.3,528.51) -264.3,518.71 R25.2@-251.17,518.71 -251.17,520.29 -228.4,543.06 cw(c-221.47,536.13) -221.47,545.93 -196.94,545.93 cw(c-196.94,536.13) -190.01,543.06 -127.55,480.59 ccw(c-120.62,487.52) -120.62,477.72 -36.13,477.72 v1(-34.38,474.66) ; U1.D10@-125.98,94.49 -112.04,77.76 v1(-109.67,77.71) ; -1086.61,266.14 cw(c-1076.81,266.14) -1083.74,273.07 ; -1086.61,266.14 cw(c-1076.81,266.14) -1083.74,273.07 ; -1086.61,266.14 cw(c-1076.81,266.14) -1083.74,273.07
  Mid-Layer 1 w5.6: v1(-1069.04,287.77) -1027.92,287.77 ; v1(588.43,333.25) 591.69,336.52 591.69,374.92 521.21,445.4 510.12,445.4 416.31,539.22 43.14,539.22 -12.57,483.51 -25.52,483.51 v1(-34.38,474.66) -45.25,463.79 ; -1027.92,287.77 ccw(c-1027.92,297.57) -1020.99,290.64 ; -1027.92,287.77 ccw(c-1027.92,297.57) -1020.99,290.64 ; -1027.92,287.77 ccw(c-1027.92,297.57) -1020.99,290.64 ; -1020.99,290.64 -1008.58,303.06 ; -1008.58,303.06 cw(c-1001.65,296.13) -1001.65,305.93 ; -1008.58,303.06 cw(c-1001.65,296.13) -1001.65,305.93 ; -1008.58,303.06 cw(c-1001.65,296.13) -1001.65,305.93 ; -1001.65,305.93 -543.31,305.93 ; -543.31,305.93 ccw(c-543.31,315.73) -536.38,308.8 ; -543.31,305.93 ccw(c-543.31,315.73) -536.38,308.8 ; -543.31,305.93 ccw(c-543.31,315.73) -536.38,308.8 ; -536.38,308.8 -510.13,335.05 ; -510.13,335.05 cw(c-503.2,328.12) -503.2,337.92 ; -510.13,335.05 cw(c-503.2,328.12) -503.2,337.92 ; -510.13,335.05 cw(c-503.2,328.12) -503.2,337.92 ; -503.2,337.92 -414.69,337.92 ; -414.69,337.92 ccw(c-414.69,347.72) -407.76,340.79 ; -414.69,337.92 ccw(c-414.69,347.72) -407.76,340.79 ; -414.69,337.92 ccw(c-414.69,347.72) -407.76,340.79 ; -407.76,340.79 v2(-400.82,347.73) -380.51,368.05 ; -380.51,368.05 cw(c-373.58,361.12) -373.58,370.92 ; -380.51,368.05 cw(c-373.58,361.12) -373.58,370.92 ; -373.58,370.92 -342.01,370.92 ; -342.01,370.92 ccw(c-342.01,380.72) -335.08,373.79 ; -342.01,370.92 ccw(c-342.01,380.72) -335.08,373.79 ; -335.08,373.79 -303.53,405.34 ; -303.53,405.34 cw(c-296.6,398.41) -296.6,408.21 ; -303.53,405.34 cw(c-296.6,398.41) -296.6,408.21 ; -296.6,408.21 -259.85,408.21 ; -259.85,408.21 ccw(c-259.85,418.01) -252.92,411.08 ; -259.85,408.21 ccw(c-259.85,418.01) -252.92,411.08 ; -252.92,411.08 -205.95,458.05 ; -205.95,458.05 cw(c-199.02,451.12) -199.02,460.92 ; -205.95,458.05 cw(c-199.02,451.12) -199.02,460.92 ; -199.02,460.92 -52.18,460.92 ; -52.18,460.92 ccw(c-52.18,470.72) -45.25,463.79 ; -52.18,460.92 ccw(c-52.18,470.72) -45.25,463.79
  Mid-Layer 2 w5.6: v2(-400.82,347.73) -400.82,341.74 ccw(c-391.02,341.74) -397.95,334.81 -387.33,324.19 ccw(c-380.4,331.12) -380.4,321.32 -355.73,321.32 cw(c-355.73,311.52) -348.8,318.45 -305.26,274.91 cw(c-312.19,267.98) -302.39,267.98 -302.39,111.32 ccw(c-292.59,111.32) -299.52,104.39 -259.49,64.35 ccw(c-252.56,71.28) -252.56,61.48 -160.84,61.48 ccw(c-160.84,71.28) -153.91,64.35 -143.42,74.84 cw(c-136.49,67.91) -136.49,77.71 v1(-109.67,77.71)
  Bottom Layer w5.6: J6.15@488.19,303.15 508.1,303.15 520.13,315.19 570.36,315.19 v1(588.43,333.25)
G_FSYNC: U1.G5 U9.8 | length 903.9
  Top Layer w5.6: U9.8@-417.84,628.33 -418.3,637.22 cw(c-408.51,637.73) -418.31,637.73 cw(c-408.51,637.73) -415.44,644.66 -408.31,651.79 cw(c-401.38,644.86) -401.38,654.66 -287.87,654.66 ccw(c-287.87,664.46) -280.94,657.53 -273.98,664.48 cw(c-267.05,657.55) -267.05,667.35 -195.78,667.35 cw(c-195.78,657.55) -188.85,664.48 -151.09,626.73 cw(c-158.02,619.8) -148.22,619.8 -148.22,525.91 ccw(c-138.42,525.91) -145.35,518.98 -125.13,498.76 ccw(c-118.21,505.69) -118.21,495.89 -23.12,495.89 cw(c-23.12,486.09) -16.19,493.02 v1(18.75,458.08) ; U1.G5@31.5,188.98 v1(46.37,203.85)
  Mid-Layer 2 w5.6: v1(18.75,458.08) 20.04,458.08 51.89,426.22 cw(c44.96,419.29) 54.76,419.29 54.76,331.12 cw(c44.96,331.12) 51.89,324.19 40.3,312.6 ccw(c47.23,305.67) 37.43,305.67 37.43,216.86 ccw(c47.23,216.86) 40.3,209.93 v1(46.37,203.85)